# Altium PCB PLC-无线通讯版-显示板-V1.PcbDoc
Units mm, origin at the board's own origin, x right, y up, seen from the top; angles counter-clockwise.
Board outline 112.5 x 42 mm, 2 copper layers (Top Layer, Bottom Layer), stack 1.271 mm thick; 33 components, 29 nets, 103 pads, 132 vias.
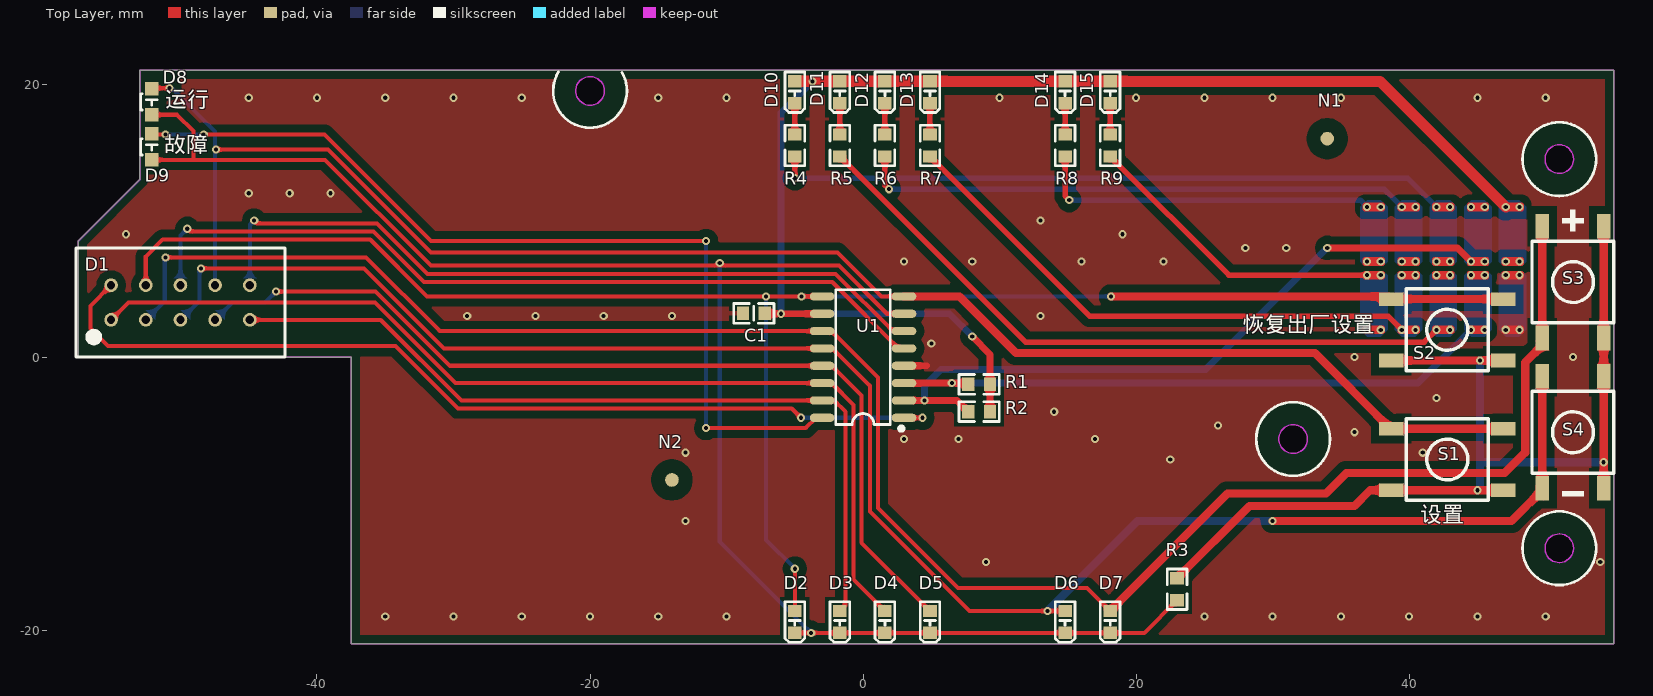
[diagram p0: Top Layer view]
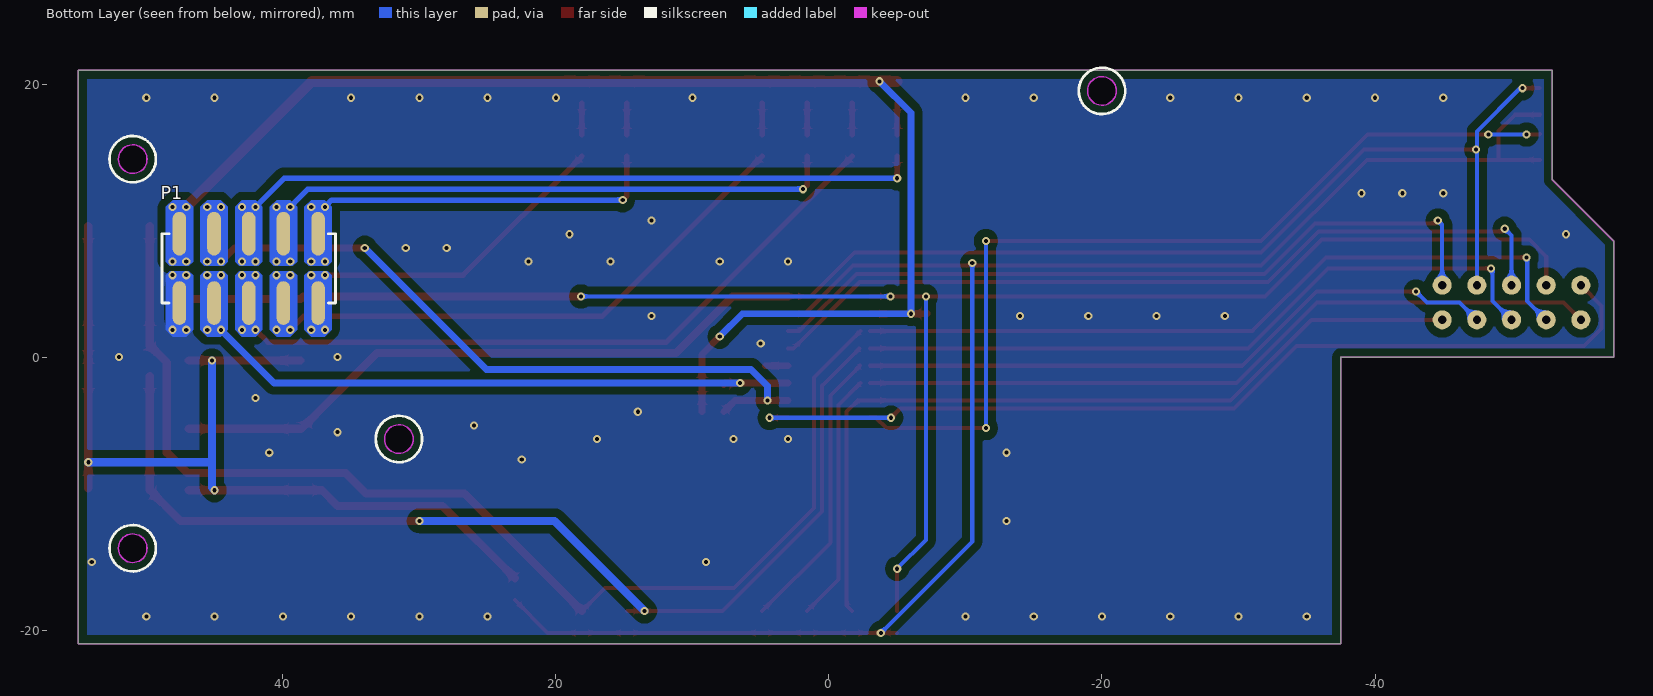
[diagram p1: Bottom Layer view, seen from below]
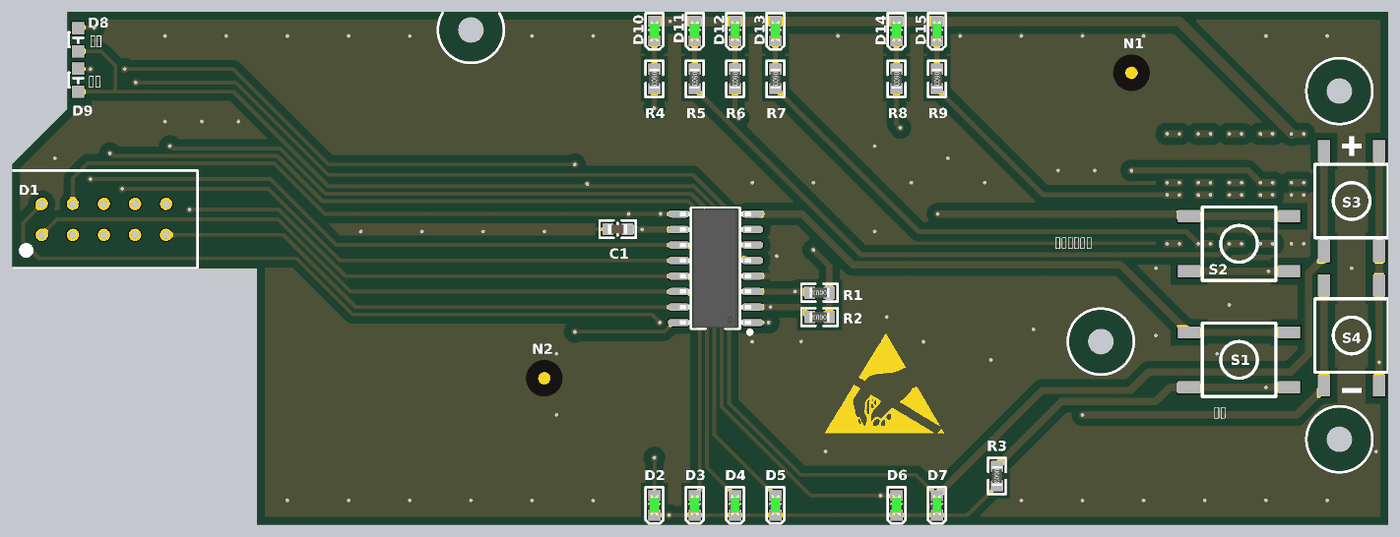
[diagram p2: 3D render of the assembled board from above, using the file's embedded part models]

## Layer stack, top to bottom
Top Solder: solder mask 0.0102, Solder Resist, Dk 3.5
Top Layer: signal copper 0.0356
Dielectric1: dielectric 1.2, FR-4, Dk 4.8
Bottom Layer: signal copper 0.0356
Bottom Solder: solder mask 0.0102, Solder Resist, Dk 3.5

## Board outline
-57.5,0 -57.5,8.5 -53,13 -53,21 55,21 55,-21 -37.5,-21 -37.5,0
cut-out: -20,20.55 ccw(c-20,19.5) -21.05,19.5 ccw(c-20,19.5) -20,18.45 ccw(c-20,19.5) -18.95,19.5 ccw(c-20,19.5)
cut-out: 31.5,-4.95 ccw(c31.5,-6) 30.45,-6 ccw(c31.5,-6) 31.5,-7.05 ccw(c31.5,-6) 32.55,-6 ccw(c31.5,-6)
cut-out: 51,-12.95 ccw(c51,-14) 49.95,-14 ccw(c51,-14) 51,-15.05 ccw(c51,-14) 52.05,-14 ccw(c51,-14)
cut-out: 51,15.55 ccw(c51,14.5) 49.95,14.5 ccw(c51,14.5) 51,13.45 ccw(c51,14.5) 52.05,14.5 ccw(c51,14.5)

## Design rules (kind name [scope] priority, off if disabled: settings)
Clearance Clearance敷铜间隔 [InPolygon] p1: gap=0.6
Clearance Clearance通用间隔 [All] p2: gap=0.3
PlaneConnect [All] p1: planeconnectstyle=Relief reliefexpansion=0.508 reliefentries=4 reliefconductorwidth=0.3 reliefairgap=0.3
PolygonConnect PolygonConnect_过孔 [All vs IsVia] p1: connectstyle=Direct reliefconductorwidth=0.254 reliefentries=4 polygonreliefangle="90 Angle" airgapwidth=0.254
PolygonConnect [All] p2: connectstyle=Relief reliefconductorwidth=0.3 reliefentries=4 polygonreliefangle="90 Angle" airgapwidth=0.6
RoutingVias [All] p1: holewidth=0.5 width=1 viastyle="Through Hole" minholewidth=0.4 minwidth=0.8 maxholewidth=10 maxwidth=10
SolderMaskExpansion [All] p1: expansion=0.102
Width [All] p1: maxlimit=10 minlimit=0.3 preferedwidth=0.5
29 further rules are at their usual default settings.

## Components (designator, comment, footprint, x,y, rotation, side; value= is the part's Value field where it differs from the comment)
C1 "105" C-0603 -8,3.2 r0 top
D1 "2351A，黄绿色，没小数点" 3位0.25英寸 -50,4 r0 top
D2 "DI1" LED-0603-GREEN -5,-19.4 r90 top
D3 "DI2" LED-0603-GREEN -1.7,-19.4 r90 top
D4 "DI3" LED-0603-GREEN 1.6,-19.4 r90 top
D5 "DI4" LED-0603-GREEN 4.9,-19.4 r90 top
D6 "DO1" LED-0603-GREEN 14.8,-19.4 r90 top
D7 "DO2" LED-0603-GREEN 18.1,-19.4 r90 top
D8 "运行" LED-0603-侧发光 -52.1,18.7 r90 top
D9 "错误" LED-0603-侧发光 -52.1,15.4 r90 top
D10 "AI1" LED-0603-GREEN -5,19.4 r90 top
D11 "AI2" LED-0603-GREEN -1.7,19.4 r90 top
D12 "AI3" LED-0603-GREEN 1.6,19.4 r90 top
D13 "AI4" LED-0603-GREEN 4.9,19.4 r90 top
D14 "AO1" LED-0603-GREEN 14.8,19.4 r90 top
D15 "AO2" LED-0603-GREEN 18.1,19.4 r90 top
N1 "光学定位点" MARK-1mm-3mm 34,16 r0 top
N2 "光学定位点" MARK-1mm-3mm -14,-9 r0 top
P1 "" HDR2X5-贴片母座 42.5,6.5 r180 bottom
R1 "10K" R-0603 8.5,-2 r180 top
R2 "10K" R-0603 8.5,-4 r180 top
R3 "2K" R-0603 23,-17 r270 top
R4 "100" R-0603 -5,15.5 r270 top
R5 "100" R-0603 -1.7,15.5 r270 top
R6 "100" R-0603 1.6,15.5 r270 top
R7 "100" R-0603 4.9,15.5 r270 top
R8 "100" R-0603 14.8,15.5 r270 top
R9 "100" R-0603 18.1,15.5 r270 top
S1 "恢复出厂设置" SB-6*6*9.5_贴片 42.8,-7.5 r180 top
S2 "设置" SB-6*6*9.5_贴片 42.8,2 r180 top
S3 "加" SB-6*6*9.5_贴片 52,5.5 r270 top
S4 "减" SB-6*6*9.5_贴片 52,-5.5 r270 top
U1 "TM1650" SOP-16-M 0,0 r90 top

## Footprints (in the part's own frame and the unit in brackets; to place one, negate y for a bottom-side part, rotate by r counter-clockwise, add the part's x,y. Pads: shape width x height; smd on the part's side, far side on the other; paste and mask are expansions set on the pad)
3位0.25英寸 [mm]
  round 1 / inner round 1 / far side round 1.4 hole 0.6: 1(-5.08,-1.27) 2(-2.54,-1.27) 3(0,-1.27) 4(2.54,-1.27) 5(5.08,-1.27) 6(5.08,1.27) 7(2.54,1.27) 8(0,1.27) 9(-2.54,1.27) 10(-5.08,1.27)
  silkscreen extent -7.65,-4 7.65,4, body extent -7.65,-4 7.65,4, height 4
C-0603 [mm]
  rect 0.9x1 smd: 1(-0.8,0) 2(0.8,0)
  silkscreen extent -1.48,-0.72 1.48,0.72, body extent -0.8,-0.4 0.8,0.4, height 0.6
HDR2X5-贴片母座 [mm] "Connector; Header; 20x2 Position"
  oval 1x3.2 smd: 1(-5.08,-2.54) 2(-5.08,2.54) 2(-5.08,2.54) 3(-2.54,-2.54) 4(-2.54,2.54) 5(0,-2.54) 6(0,2.54) 7(2.54,-2.54) 8(2.54,2.54) 9(5.08,-2.54) 10(5.08,2.54)
  silkscreen extent -6.35,-2.54 6.35,2.54
LED-0603-GREEN [mm]
  rect 0.9x1 smd: 1(0.8,0) 2(-0.8,0)
  silkscreen extent -1.48,-0.72 1.48,0.72, body extent -0.81,-0.4 0.81,0.4, height 0.6
LED-0603-侧发光 [mm]
  rect 1x1 smd: 1(0.95,0) 2(-0.95,0)
  silkscreen extent -0.6,-0.4 0.6,0.8, body extent -0.8,-0.3 0.8,0.8, height 0.6
MARK-1mm-3mm [mm]
  round 1 smd paste-0.6 mask+1: 1(0,0)
  Top Layer pour cut-out: -1.5,0 -1.386,-0.574 -1.061,-1.061 -0.574,-1.386 0,-1.5 0,-1.5 0.574,-1.386 1.061,-1.061 1.386,-0.574 1.5,0 1.5,0 1.386,0.574 1.061,1.061 0.574,1.386 0,1.5 0,1.5 -0.574,1.386 -1.061,1.061 -1.386,0.574 -1.5,0
R-0603 [mm]
  rect 0.9x1 smd: 1(-0.8,0) 2(0.8,0)
  silkscreen extent -1.48,-0.72 1.48,0.72, body extent -0.8,-0.4 0.8,0.4, height 0.45
SB-6*6*9.5_贴片 [mm]
  rect 1.8x1 smd: 1(-4.1,2.25) 1(4.1,2.25) 2(-4.1,-2.25) 2(4.1,-2.25)
  silkscreen extent -3,-3 3,3, body extent -3,-3 3,3, height 9.5
SOP-16-M [mm]
  oval 0.6x1.8 smd: 1(-4.445,-3) 2(-3.175,-3) 3(-1.905,-3) 4(-0.635,-3) 5(0.635,-3) 6(1.905,-3) 7(3.175,-3) 8(4.445,-3) 9(4.445,3) 10(3.175,3) 11(1.905,3) 12(0.635,3) 13(-0.635,3) 14(-1.905,3) 15(-3.175,3) 16(-4.445,3)
  silkscreen extent -5.38,-2.95 4.93,2, body extent -4.9,-2.9 4.9,2.9, height 1.75

## Part data
C1: library part Cap, "Capacitor"
D1: library part 3位数码管-无点-2351A
D2 D3 D4 D5 D6 D7 D8 D9 D10 D11 D12 D13 D14 D15: library part LED-0603-Blue
N1 N2: library part 无引脚
P1: library part "Header 5X2", "Header, 5-Pin, Dual row"
R1 R2 R3 R4 R5 R6 R7 R8 R9: library part Res2-0603, "0603"
S1 S2 S3 S4: library part SB-6*6*9, "SB-6*6*10"
U1: "共阴数码管驱动器"

## Via types
v1: diameter 0.6, hole 0.3, Top Layer to Bottom Layer, tented both sides, 132 vias

## Nets (pads, with @x,y where several pads share a name; then routed paths per layer and width w, separated by ;. In a path a pad name is that pad's centre, name@x,y a point inside that pad or via, vN(x,y) a via of type N, cw(c..) or ccw(c..) an arc to the next point about the centre after c; other vN are vias at no path point)
3.3V: C1.2 D10.1 D11.1 D12.1 D13.1 D14.1 D15.1 P1.2 R1.1 R2.1 U1.10 | length 98.8
  Top Layer w0.5: C1.2 -7.175,3.175 v1(-6,3.175) U1.10 ; v1(8,1.5) 9.3,0.2 R1.1 R2.1
  Top Layer w0.8: D10.1 D11.1 D12.1 D13.1 D14.1 D15.1 37.88,20.2 v1(47.08,11)
  Bottom Layer w0.5: v1(-3.7,20.2) -6,17.9 v1(-6,3.175) 6.325,3.175 v1(8,1.5)
  other v1: 47.08,7 48.08,7 48.08,11
A: D1.7 D8.1 S1.2 U1.8 | length 119.9
  Top Layer w0.3: D8.1@-52.05,19.7 v1(-50.8,19.7) ; v1(-47.4,15.2) -39.2,15.2 -31.65,7.65 -1.86,7.65 1.345,4.445 U1.8
  Top Layer w0.6: U1.8 7.055,4.445 11.2,0.3 33.1,0.3 38.65,-5.25 38.7,-5.25 S1.2@46.9,-5.25
  Bottom Layer w0.3: v1(-50.8,19.7) -50.639,19.7 -47.46,16.521 D1.7
B: D1.9 D2.1 S2.2 U1.9 | length 129.3
  Top Layer w0.3: D1.9 -52.54,7.36 -51.3,8.6 -36.1,8.6 -31.945,4.445 v1(-7.1,4.445) v1(-4.5,4.445) U1.9 ; D2.1 v1(-5,-15.5)
  Top Layer w0.6: v1(18.155,4.445) 38.505,4.445 38.7,4.25 S2.2@46.9,4.25
  Bottom Layer w0.3: D1.9 D1.9@-52.5,5.27 ; v1(-7.1,4.445) -7.1,-13.4 v1(-5,-15.5) ; v1(-4.5,4.445) v1(18.155,4.445)
C: D1.2 D7.1 S3.2 U1.11 | length 142.3
  Top Layer w0.3: v1(-51.1,7.3) -36.4,7.3 -31.005,1.905 U1.11 ; U1.11@-2.305,1.905 1.1,-1.5 1.1,-11.051 6.949,-16.9 16.4,-16.9 D7.1
  Top Layer w0.6: D7.1 26.7,-10 33.9,-10 35.4,-8.5 47,-8.5 48.5,-7 48.5,-0.401 49.75,0.849 49.75,1.4 S3.2@49.75,9.6
  Bottom Layer w0.3: D1.2 -51.15,4.12 -51.15,7.25 v1(-51.1,7.3)
D: D1.3 D6.1 S4.2 U1.12 | length 131
  Top Layer w0.3: v1(-48.5,6.5) -36.554,6.5 -30.689,0.635 U1.12 ; U1.12@-2.235,0.635 0.5,-2.1 0.5,-11.3 7.8,-18.6 D6.1
  Top Layer w0.6: v1(30,-12) 47.5,-12 49.75,-9.75 49.75,-9.6 S4.2@49.75,-1.4
  Bottom Layer w0.3: D1.3 -48.61,4.12 -48.61,6.39 v1(-48.5,6.5)
  Bottom Layer w0.6: v1(13.5,-18.6) 20.1,-12 v1(30,-12)
DIG1: D1.10 U1.1 | length 68.8
  Top Layer w0.3: D1.10 -56.6,3.75 -56.6,2.1 -55.3,0.8 -34.249,0.8 -29.674,-3.775 -5.225,-3.775 v1(-4.555,-4.445) ; U1.1 v1(4.345,-4.445)
  Bottom Layer w0.3: v1(-4.555,-4.445) v1(4.345,-4.445)
DIG2: D1.8 U1.5 | length 60.5
  Top Layer w0.3: v1(-49.5,9.4) -49.3,9.2 -35.851,9.2 -32.151,5.5 -2.256,5.5 2.609,0.635 U1.5
  Bottom Layer w0.3: D1.8 -50,8.9 v1(-49.5,9.4)
DIG3: D1.6 U1.6 | length 55.8
  Top Layer w0.3: v1(-44.6,10) -44.4,9.8 -35.603,9.8 -31.903,6.1 -2.007,6.1 2.188,1.905 U1.6
  Bottom Layer w0.3: D1.6 -44.92,9.68 v1(-44.6,10)
DIG4: D2.2 D3.2 D4.2 D5.2 D6.2 D7.2 D8.2 D9.2 R3.2 U1.7 | length 124.3
  Top Layer w0.3: D9.2 -49,14.45 ; D8.2 -50.25,17.75 -49.05,16.55 -49.05,14.5 -49,14.45 ; D2.2 D3.2 D4.2 D5.2 D6.2 D7.2 20.6,-20.2 R3.2 ; U1.7 1.766,3.175 -1.759,6.7 -31.654,6.7 -39.404,14.45 -49,14.45
  Bottom Layer w0.3: v1(-10.5,6.9) -10.5,-13.5 v1(-3.8,-20.2)
DP: D9.1 U1.16 | length 66.4
  Top Layer w0.3: D9.1 -52.05,16.3 v1(-51.1,16.3) ; v1(-48.3,16.3) -39.451,16.3 -31.651,8.5 v1(-11.5,8.5) ; v1(-11.5,-5.2) -4.2,-5.2 -3.445,-4.445 U1.16
  Bottom Layer w0.3: v1(-51.1,16.3) v1(-48.3,16.3) ; v1(-11.5,-5.2) v1(-11.5,8.5)
E: D1.4 D5.1 U1.13 | length 68.5
  Top Layer w0.3: v1(-43,4.8) -35.703,4.8 -30.268,-0.635 U1.13 ; U1.13@-2.265,-0.635 -0.1,-2.8 -0.1,-13.6 D5.1
  Bottom Layer w0.3: D1.4 -46.19,4 -43.8,4 v1(-43,4.8)
F: D1.1 D4.1 U1.14 | length 73.4
  Top Layer w0.3: D1.1 -53.81,4 -35.751,4 -29.846,-1.905 U1.14 ; U1.14@-2.295,-1.905 -0.7,-3.5 -0.7,-16.3 D4.1
G: D1.5 D3.1 U1.15 | length 61.2
  Top Layer w0.3: D1.5 -35.33,2.73 -29.425,-3.175 U1.15 -2.125,-3.175 -1.3,-4 -1.3,-18.2 D3.1
GND: C1.1 P1.1 U1.4 | length 1.7
  Top Layer w0.5: U1.4 4.665,-0.635
  other v1: -35,-19 -30,-19 -25,-19 -20,-19 -15,-19 -10,-19 25,-19 30,-19 35,-19 40,-19 45,-19 50,-19 9,-15 54,-15 -13,-12 22.5,-7.5 -13,-7 41,-7 3,-6 7,-6 17,-6 36,-5.5 26,-5 14,-4 42,-3 36,0 52,0 5,1 47.08,2 48.08,2 -29,3 -24,3 -19,3 -14,3 13,3 47.08,6 48.08,6 3,7 8,7 16,7 22,7 28,8 31,8 -54,9 19,9 13,10 -45,12 -42,12 -39,12 -45,19 -40,19 -35,19 -30,19 -25,19 -15,19 -10,19 10,19 20,19 25,19 30,19 35,19 45,19 50,19
LED-AI1: P1.6 R4.2 | length 49.5
  Top Layer w0.4: v1(-5,13.1) R4.2
  Bottom Layer w0.4: v1(-5,13.1) 39.9,13.1 v1(42,11)
  other v1: 42,7 43,7 43,11
LED-AI2: P1.5 R5.2 | length 49.7
  Top Layer w0.4: R5.2 11.9,1.1 41.1,1.1 v1(42,2)
  other v1: 43,2 42,6 43,6
LED-AI3: P1.8 R6.2 | length 40.6
  Top Layer w0.4: R6.2 1.6,12.6 v1(1.9,12.3)
  Bottom Layer w0.4: v1(1.9,12.3) 38.16,12.3 v1(39.46,11)
  other v1: 39.46,7 40.46,7 40.46,11
LED-AI4: P1.7 R7.2 | length 39.8
  Top Layer w0.4: R7.2 16.6,3 38.46,3 v1(39.46,2)
  other v1: 40.46,2 39.46,6 40.46,6
LED-AO1: P1.10 R8.2 | length 26.6
  Top Layer w0.4: R8.2 14.8,11.8 v1(15.1,11.5)
  Bottom Layer w0.4: v1@15,11.5 v1(15.1,11.5) 36.42,11.5 v1(36.92,11) ; P1.10 P1.10@37.42,10.18
  other v1: 36.92,7 37.92,7 37.92,11
LED-AO2: P1.9 R9.2 | length 22.4
  Top Layer w0.4: R9.2 26.8,6 v1(36.92,6)
  other v1: 36.92,2 37.92,2 37.92,6
NetD10_2: D10.2 R4.1 | length 2.3
  Top Layer w0.4: R4.1 D10.2
NetD11_2: D11.2 R5.1 | length 2.3
  Top Layer w0.4: R5.1 D11.2
NetD12_2: D12.2 R6.1 | length 2.3
  Top Layer w0.4: R6.1 D12.2
NetD13_2: D13.2 R7.1 | length 2.3
  Top Layer w0.4: R7.1 D13.2
NetD14_2: D14.2 R8.1 | length 2.3
  Top Layer w0.4: R8.1 D14.2
NetD15_2: D15.2 R9.1 | length 2.3
  Top Layer w0.4: R9.1 D15.2
NetR3_1: R3.1 S1.1 S2.1 S3.1 S4.1 | length 72.5
  Top Layer w0.6: R3.1 28.3,-10.9 36,-10.9 37.15,-9.75 38.7,-9.75 v1(45,-9.75) S1.1@46.9,-9.75 ; S2.1@38.7,-0.25 v1(45.2,-0.25) S2.1@46.9,-0.25 ; S4.1@54.25,-9.6 v1(54.25,-7.7) 54.25,-1.4 54.25,1.4 S3.1@54.25,9.6
  Bottom Layer w0.6: v1(45,-9.75) 45.2,-9.55 v1(45.2,-0.25) ; 45.3,-7.7 v1(54.25,-7.7)
SCL: P1.4 R2.2 U1.2 | length 50.8
  Top Layer w0.5: U1.2 v1(4.5,-3.175) 6.875,-3.175 R2.2 ; v1(34,8) 43.54,8 v1(44.54,7)
  Bottom Layer w0.5: v1(4.5,-3.175) 4.5,-2.1 5.7,-0.9 25.1,-0.9 v1(34,8)
  other v1: 45.54,7 44.54,11 45.54,11
SDA: P1.3 R1.2 U1.3 | length 44.4
  Top Layer w0.5: U1.3 v1(6.5,-1.905) 7.605,-1.905 R1.2
  Bottom Layer w0.5: v1(6.5,-1.905) 6.505,-1.9 40.64,-1.9 v1(44.54,2)
  other v1: 45.54,2 44.54,6 45.54,6
pads on no net: N1.1 N2.1

## Polygon pours and split planes (outlines as drawn)
GND on Top Layer "Mechanical 15-No Net" (solid, remove dead copper, pour order 4): -53,21 55,21 55,-21 -37.5,-21 -37.5,0 -57.5,0 -57.5,8.5 -53,13
GND on Bottom Layer "Mechanical 15-No Net" (solid, remove dead copper, pour order 6): -53,21 55,21 55,-21 -37.5,-21 -37.5,0 -57.5,0 -57.5,8.5 -53,13

## Keep-outs
Keep-Out Layer:
  circle w0.1: c-20,19.5 r1.05
  circle w0.1: c31.5,-6 r1.05
  circle w0.1: c51,-14 r1.05
  circle w0.1: c51,14.5 r1.05
  lines w0.1: -57.5,0 -57.5,8.5 -53,13 -53,21 55,21 55,-21 -37.5,-21 -37.5,0 -57.5,0

## Other copper
Top Layer:
  region net GND: 48.28,2.3 48.38,2.2 48.38,1.8 48.28,1.7 46.88,1.7 46.78,1.8 46.78,2.2 46.88,2.3
  region net SDA: 45.74,2.3 45.84,2.2 45.84,1.8 45.74,1.7 44.34,1.7 44.24,1.8 44.24,2.2 44.34,2.3
  region net LED-AI2: 43.2,2.3 43.3,2.2 43.3,1.8 43.2,1.7 41.8,1.7 41.7,1.8 41.7,2.2 41.8,2.3
  region net LED-AI4: 40.66,2.3 40.76,2.2 40.76,1.8 40.66,1.7 39.26,1.7 39.16,1.8 39.16,2.2 39.26,2.3
  region net LED-AO2: 38.12,2.3 38.22,2.2 38.22,1.8 38.12,1.7 36.72,1.7 36.62,1.8 36.62,2.2 36.72,2.3
  region net LED-AO2: 38.12,6.3 38.22,6.2 38.22,5.8 38.12,5.7 36.72,5.7 36.62,5.8 36.62,6.2 36.72,6.3
  region net LED-AI4: 40.66,6.3 40.76,6.2 40.76,5.8 40.66,5.7 39.26,5.7 39.16,5.8 39.16,6.2 39.26,6.3
  region net LED-AI2: 43.2,6.3 43.3,6.2 43.3,5.8 43.2,5.7 41.8,5.7 41.7,5.8 41.7,6.2 41.8,6.3
  region net SDA: 45.74,6.3 45.84,6.2 45.84,5.8 45.74,5.7 44.34,5.7 44.24,5.8 44.24,6.2 44.34,6.3
  region net GND: 48.28,6.3 48.38,6.2 48.38,5.8 48.28,5.7 46.88,5.7 46.78,5.8 46.78,6.2 46.88,6.3
  region net 3.3V: 48.28,7.3 48.38,7.2 48.38,6.8 48.28,6.7 46.88,6.7 46.78,6.8 46.78,7.2 46.88,7.3
  region net SCL: 45.74,7.3 45.84,7.2 45.84,6.8 45.74,6.7 44.34,6.7 44.24,6.8 44.24,7.2 44.34,7.3
  region net LED-AI1: 43.2,7.3 43.3,7.2 43.3,6.8 43.2,6.7 41.8,6.7 41.7,6.8 41.7,7.2 41.8,7.3
  region net LED-AI3: 40.66,7.3 40.76,7.2 40.76,6.8 40.66,6.7 39.26,6.7 39.16,6.8 39.16,7.2 39.26,7.3
  region net LED-AO1: 38.12,7.3 38.22,7.2 38.22,6.8 38.12,6.7 36.72,6.7 36.62,6.8 36.62,7.2 36.72,7.3
  region net LED-AO1: 38.12,11.3 38.22,11.2 38.22,10.8 38.12,10.7 36.72,10.7 36.62,10.8 36.62,11.2 36.72,11.3
  region net LED-AI3: 40.66,11.3 40.76,11.2 40.76,10.8 40.66,10.7 39.26,10.7 39.16,10.8 39.16,11.2 39.26,11.3
  region net 3.3V: 48.28,11.3 48.38,11.2 48.38,10.8 48.28,10.7 46.88,10.7 46.78,10.8 46.78,11.2 46.88,11.3
  region net SCL: 45.74,11.3 45.84,11.2 45.84,10.8 45.74,10.7 44.34,10.7 44.24,10.8 44.24,11.2 44.34,11.3
  region net LED-AI1: 43.2,11.3 43.3,11.2 43.3,10.8 43.2,10.7 41.8,10.7 41.7,10.8 41.7,11.2 41.8,11.3
  pour cut-out: -22.7,19.5 ccw(c-20,19.5) -20,16.8 ccw(c-20,19.5) -17.3,19.5 ccw(c-20,19.5) -20,22.2 ccw(c-20,19.5)
  pour cut-out: 28.8,-6 ccw(c31.5,-6) 31.5,-8.7 ccw(c31.5,-6) 34.2,-6 ccw(c31.5,-6) 31.5,-3.3 ccw(c31.5,-6)
  pour cut-out: 48.3,-14 ccw(c51,-14) 51,-16.7 ccw(c51,-14) 53.7,-14 ccw(c51,-14) 51,-11.3 ccw(c51,-14)
  pour cut-out: 48.3,14.5 ccw(c51,14.5) 51,11.8 ccw(c51,14.5) 53.7,14.5 ccw(c51,14.5) 51,17.2 ccw(c51,14.5)
Bottom Layer:
  region net LED-AO1: 36.92,11.5 37.92,11.5 38.42,11 38.42,7 38.12,6.7 36.72,6.7 36.42,7 36.42,11
  region net LED-AO2: 37.92,1.5 36.92,1.5 36.42,2 36.42,6 36.72,6.3 38.12,6.3 38.42,6 38.42,2
  region net LED-AI3: 39.46,11.5 40.46,11.5 40.96,11 40.96,7 40.66,6.7 39.26,6.7 38.96,7 38.96,11
  region net LED-AI4: 40.46,1.5 39.46,1.5 38.96,2 38.96,6 39.26,6.3 40.66,6.3 40.96,6 40.96,2
  region net 3.3V: 47.08,11.5 48.08,11.5 48.58,11 48.58,7 48.28,6.7 46.88,6.7 46.58,7 46.58,11
  region net GND: 48.08,1.5 47.08,1.5 46.58,2 46.58,6 46.88,6.3 48.28,6.3 48.58,6 48.58,2
  region net SCL: 44.54,11.5 45.54,11.5 46.04,11 46.04,7 45.74,6.7 44.34,6.7 44.04,7 44.04,11
  region net SDA: 45.54,1.5 44.54,1.5 44.04,2 44.04,6 44.34,6.3 45.74,6.3 46.04,6 46.04,2
  region net LED-AI2: 43,1.5 42,1.5 41.5,2 41.5,6 41.8,6.3 43.2,6.3 43.5,6 43.5,2
  region net LED-AI1: 42,11.5 43,11.5 43.5,11 43.5,7 43.2,6.7 41.8,6.7 41.5,7 41.5,11
  pour cut-out: -21.7,19.5 ccw(c-20,19.5) -20,17.8 ccw(c-20,19.5) -18.3,19.5 ccw(c-20,19.5) -20,21.2 ccw(c-20,19.5)
  pour cut-out: 29.8,-6 ccw(c31.5,-6) 31.5,-7.7 ccw(c31.5,-6) 33.2,-6 ccw(c31.5,-6) 31.5,-4.3 ccw(c31.5,-6)
  pour cut-out: 49.3,-14 ccw(c51,-14) 51,-15.7 ccw(c51,-14) 52.7,-14 ccw(c51,-14) 51,-12.3 ccw(c51,-14)
  pour cut-out: 49.3,14.5 ccw(c51,14.5) 51,12.8 ccw(c51,14.5) 52.7,14.5 ccw(c51,14.5) 51,16.2 ccw(c51,14.5)

## Silkscreen, mask and mechanical layers (free items; w line width, h text height)
Top Overlay:
  circle w0.2: c31.5,-6 r2.7
  circle w0.2: c51,-14 r2.7
  circle w0.2: c51,14.5 r2.7
  region: 51.2,-9.8 51.2,-10.2 52.8,-10.2 52.8,-9.8
  region: 52.8,9.8 52.8,10.2 51.2,10.2 51.2,9.8
  rectangle: 51.8,9.2 52.2,10.8
  lines w0.2: -22.315,20.889 ccw(c-20,19.5) -17.662,20.85
  text "运行" at -51.1,17.9 h2
  text "故障" at -51.2,14.6 h2
  text "恢复出厂设置" at 27.8,1.4 h2
  text "设置" at 40.8,-12.5 h2
Bottom Overlay:
  circle w0.2: c-20,19.5 r1.7
  circle w0.2: c31.5,-6 r1.7
  circle w0.2: c51,-14 r1.7
  circle w0.2: c51,14.5 r1.7
Top Solder:
  drawing of 774 lines, arcs and shapes, not listed
Mechanical 9:
  lines w0.1: -39,-19.4 37.5,-19.4 ; -39,19.4 37.5,19.4 ; -33.5,-21.5 -33.5,-18 ; -33.5,18 -33.5,21.5 ; -30.2,-21.5 -30.2,-18 ; -30.2,18 -30.2,21.5 ; -26.9,-21.5 -26.9,-18 ; -26.9,18 -26.9,21.5 ; -23.6,-21.5 -23.6,-18 ; -20.3,-21.5 -20.3,-18 ; -17,-21.5 -17,-18 ; -13.7,-21.5 -13.7,-18 ; -10.4,-21.5 -10.4,-18 ; -10.4,18 -10.4,21.5 ; -5,-20.4 -5,-17.4 ; -5,17.4 -5,20.4 ; -1.7,-21.5 -1.7,-18 ; -1.7,18 -1.7,21.5 ; 1.6,-21.5 1.6,-18 ; 1.6,18 1.6,21.5 ; 4.9,-21.5 4.9,-18 ; 4.9,18 4.9,21.5 ; 8.2,-21.5 8.2,-18 ; 8.2,18 8.2,21.5 ; 11.5,-21.5 11.5,-18 ; 11.5,18 11.5,21.5 ; 14.8,-21.5 14.8,-18 ; 14.8,18 14.8,21.5 ; 18.1,-21.5 18.1,-18 ; 18.1,18 18.1,21.5
Mechanical 14:
  lines w0.1: -60,0 60,0 ; -53.8,10 -53.8,42.3 ; -39,-26.5 57.5,-26.5 ; -39,26.5 57.5,26.5 ; 0,-40 0,40 ; -58.5,-0.5 -41.5,-0.5 ; -58.5,-0.5 -58.5,8.4 ; -58.5,-0.5 -41.5,8.4 ; -58.5,8.4 -41.5,8.4 ; -58.5,8.4 -41.5,-0.5 ; -41.5,-0.5 -41.5,8.4
Mechanical 15:
  lines w0.1: -73.5,-24 69,-24 ; -60,-0.5 -39,-0.5 -39,-40 ; -55.2,15.4 -52.4,15.4 ; -55.1,18.7 -52.3,18.7 ; -54.7,22 -52.3,22 ; -50.5,-31.5 -50.5,31.5 ; -41.2,40 -41.2,24 -39,24 -39,40 ; -14.2,-41.4 -14.2,-28.4 ; 32.7,-41.4 32.7,-28.4 ; 37.2,2 47.9,2 ; 39,-7.5 46,-7.5 ; 42.8,-13 42.8,18 ; 50.5,-31.5 50.5,31.5 ; -60,-40 -60,40 59.5,40 59.5,-40 -60,-40 ; -54.6,14.6 -54.6,16.2 -53,16.2 -53,14.6 -54.6,14.6 ; -54.6,17.9 -54.6,19.5 -53,19.5 -53,17.9 -54.6,17.9 ; -54.6,21.2 -54.6,22.8 -53,22.8 -53,21.2 -54.6,21.2 ; 47.2,-11 56.65,-11 56.65,11 47.2,11 47.2,-11
  lines w0.2: -43.5,-117.5 44.5,-117.5 ; -43.5,-111.5 44.5,-111.5 ; -43.5,-105.5 44.5,-105.5 ; -43.5,-99.5 44.5,-99.5 ; -43.5,-93.5 44.5,-93.5 ; -43.5,-87.5 44.5,-87.5 ; -43.5,-81.5 44.5,-81.5 ; -21.5,-123.5 -21.5,-75.5 -21.5,-69.5 ; -43.5,-75.5 -43.5,-123.5 44.5,-123.5 44.5,-75.5 ; -43.5,-75.5 44.5,-75.5 ; -43.5,-75.5 -43.5,-69.5 44.5,-69.5 44.5,-75.5
  text "邵宁鹏20180202" at 51.6,-19.2 h0.1
  text "公司" at -42.5,-74.5 h5
  text "杭州久天科技有限公司" at -18.5,-74.5 h5
  text "工程" at -42.5,-80.5 h5
  text "设计" at -42.5,-86.5 h5
  text "邵宁鹏" at -18.5,-86.5 h5
  text "日期" at -42.5,-92.5 h5
  text "板厚" at -42.5,-98.5 h5
  text "1.2mm" at -18.5,-98.5 h5
  text "阻焊油" at -42.5,-104.5 h5
  text "绿色" at -18.5,-104.5 h5
  text "丝印" at -42.5,-110.5 h5
  text "白色" at -18.5,-110.5 h5
  text "板材" at -42.5,-116.5 h5
  text "FR-4" at -18.5,-116.5 h5
  text "其他" at -42.5,-122.5 h5
  text "有铅喷锡，过孔盖油" at -18.5,-122.5 h5

## Dimensions
56,-21 to 56,21 on Mechanical 15
-57.5,-2.5 to 55,-22.5 on Mechanical 15